# Altium PCB Pianoshield.PcbDoc
Units mil, origin at the board's own origin, x right, y up, seen from the top; angles counter-clockwise.
Board outline 2364.2 x 1578.97 mil, 2 copper layers (Top Layer, Bottom Layer); 66 components, 63 nets, 211 pads, 62 vias.
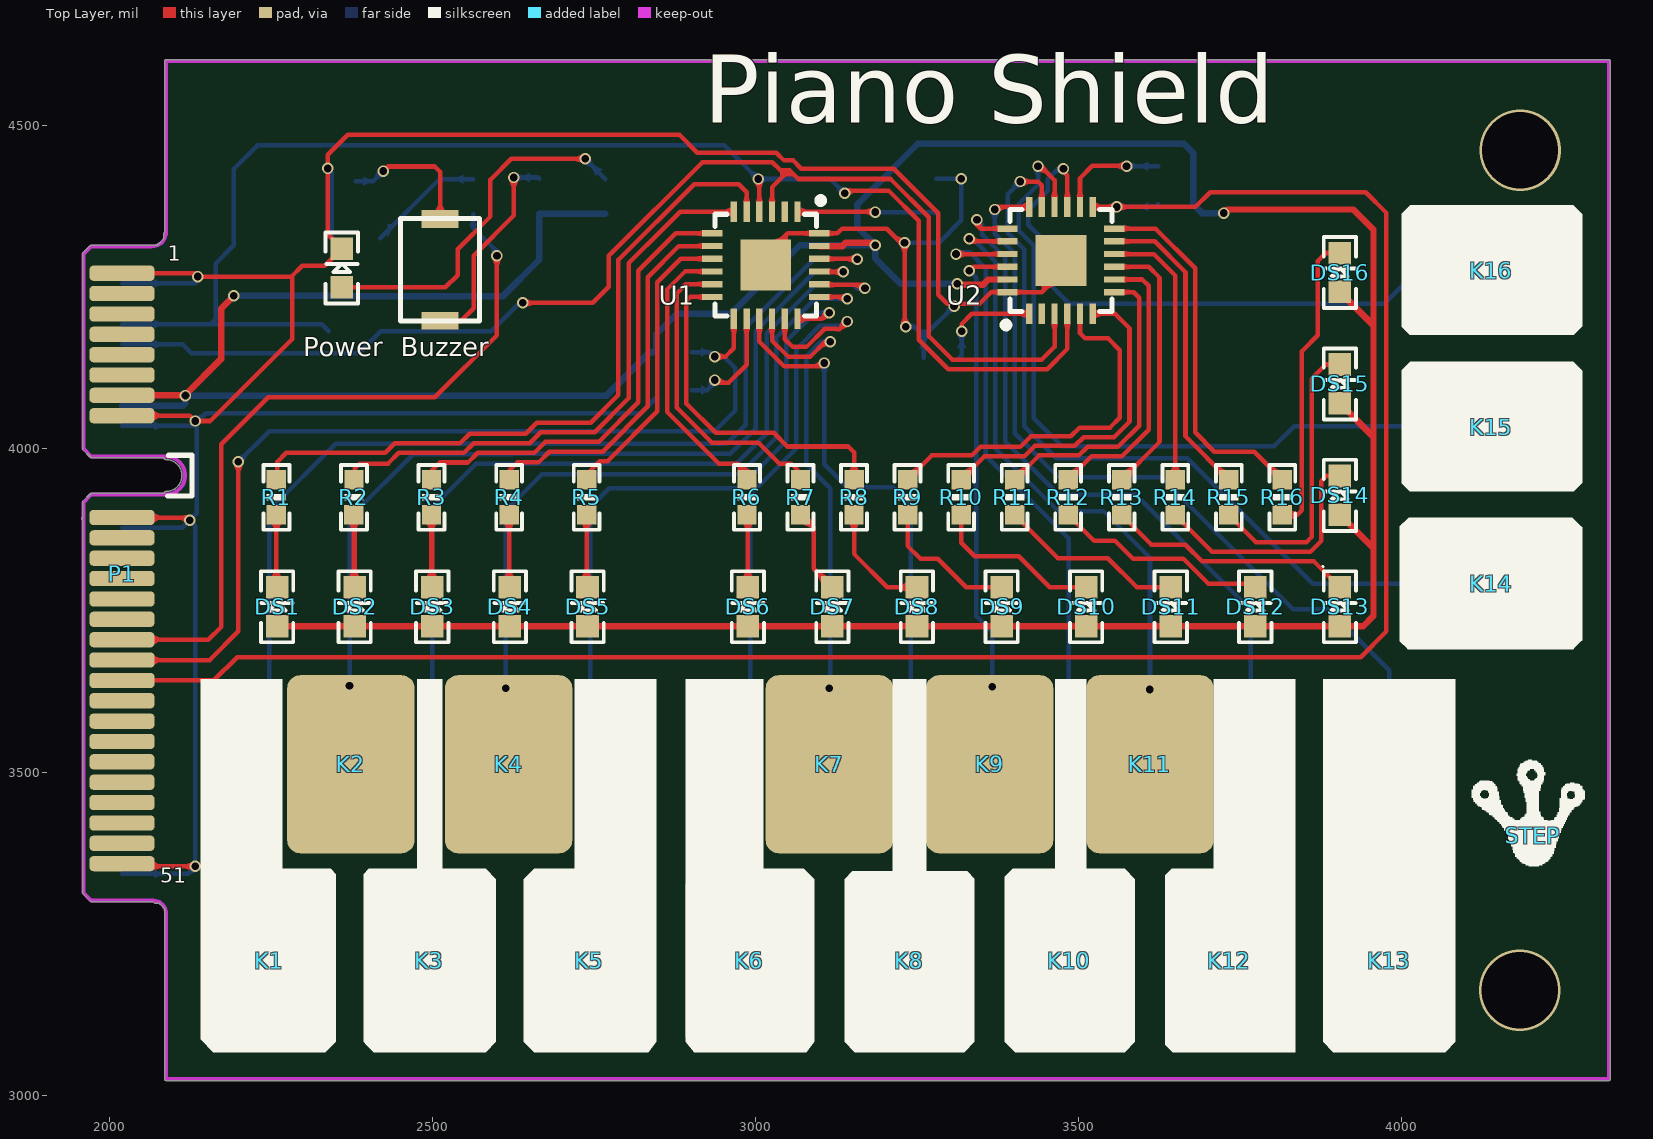
[diagram p0: Top Layer view]
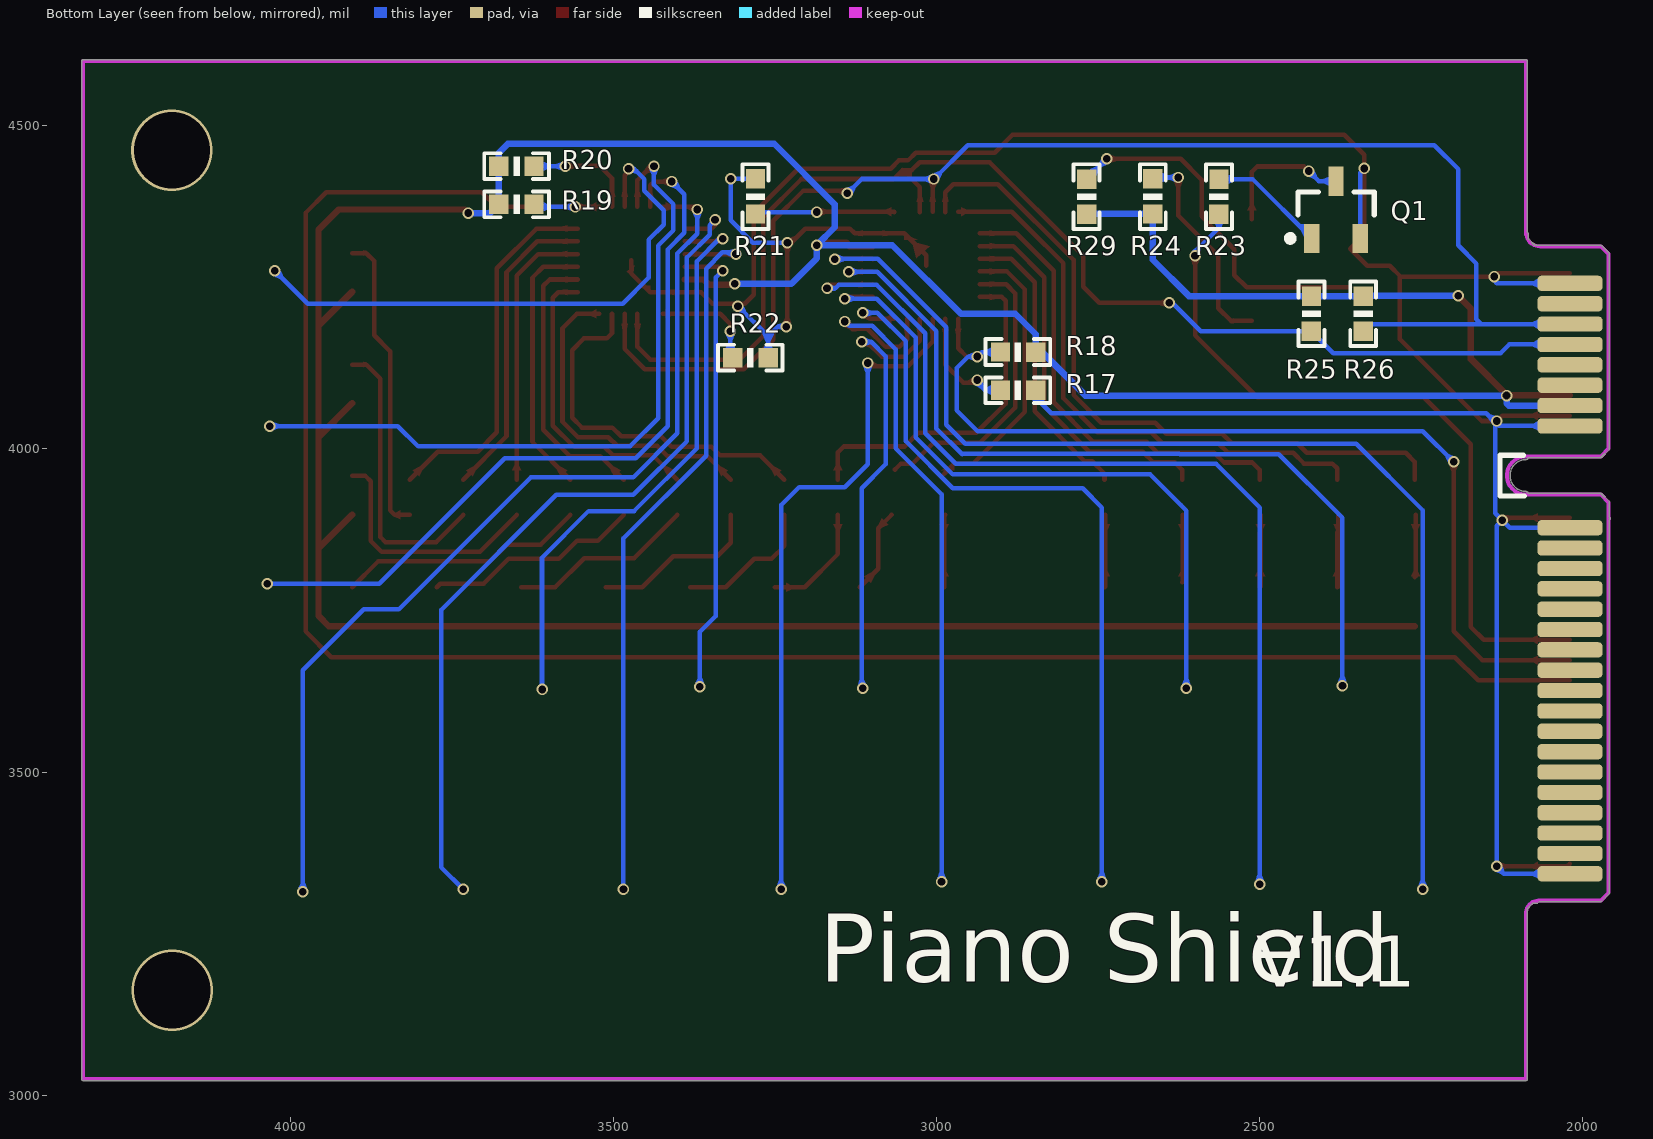
[diagram p1: Bottom Layer view, seen from below]

## Layer stack, top to bottom
Top Solder: solder mask 0.4, Solder Resist, Dk 3.5
Top Layer: signal copper 1.4
Dielectric 1: dielectric 12.6, FR-4, Dk 4.8
Bottom Layer: signal copper 1.4
Bottom Solder: solder mask 0.4, Solder Resist, Dk 3.5

## Board outline
1958.96,3313.52 1958.96,3890.74 cw(c1959.84,3892.52) 1958.44,3893.92 1958.96,3894.44 1958.96,3917.41 cw(c1960.94,3917.41) 1959.55,3918.82 1959.54,3918.81 1971.55,3930.82 1971.54,3930.81 cw(c1972.95,3929.42) 1972.95,3931.4 2084.29,3931.4 cw(c2088.9,3929.42) 2088.78,3934.43 ccw(c2088.18,3958.95) 2112.71,3958.95 ccw(c2088.18,3958.95) 2088.78,3983.46 cw(c2088.9,3988.47) 2084.29,3986.49 1972.99,3986.49 cw(c1972.99,3988.47) 1971.58,3987.08 1971.59,3987.07 1959.54,3999.12 1959.55,3999.11 cw(c1960.94,4000.52) 1958.96,4000.52 1958.96,4301.46 cw(c1960.94,4301.46) 1959.55,4302.88 1959.54,4302.87 1971.35,4314.68 1971.34,4314.67 cw(c1972.76,4313.28) 1972.76,4315.26 2074.66,4315.26 2084.24,4324.84 2084.24,4332.57 cw(c2086.22,4332.57) 2084.83,4333.99 2084.82,4333.98 2085.81,4334.97 2085.81,4598.82 cw(c2087.8,4598.82) 2086.21,4600.01 cw(c2088.19,4600) 2088.19,4601.98 4320.08,4601.98 ccw(c4320.08,4600) 4320.04,4601.98 ccw(c4320,4600) 4320,4601.98 4320.08,4601.98 cw(c4320.08,4600) 4322.06,4600 4322.06,3025.2 cw(c4320.08,3025.2) 4321.88,3024.36 cw(c4320,3025) 4320,3023.02 2088.19,3023.02 cw(c2088.19,3025) 2086.21,3025 2086.21,3288.94 2077.92,3297.23 2071.46,3297.23 cw(c2071.46,3299.21) 2070.05,3297.82 2070.06,3297.81 2068.6,3299.27 1973.21,3299.27 cw(c1973.21,3301.25) 1971.8,3299.86 1971.81,3299.85 1959.54,3312.12 1959.55,3312.11 cw(c1960.94,3313.52)

## Design rules (kind name [scope] priority, off if disabled: settings)
Clearance [All] p1: gap=6
PolygonConnect [All] p1: connectstyle=Relief reliefconductorwidth=10 reliefentries=4 polygonreliefangle="90 Angle" airgapwidth=10
RoutingVias [All] p1: holewidth=11.81 width=17.72 viastyle="Through Hole" minholewidth=11.81 minwidth=17.72 maxholewidth=11.81 maxwidth=17.72
SolderMaskExpansion [All] p1: expansion=4
Width [All] p1: maxlimit=10 minlimit=6 preferedwidth=7
30 further rules are at their usual default settings.

## Components (designator, comment, footprint, x,y, rotation, side; value= is the part's Value field where it differs from the comment)
Buzzer "BUZZER_SOT" BUZZER_1 2512,4277 r270 top (schematic designator BUZZER)
DS1 "LED1" LED0603 2259.94,3725.97 r90 top
DS2 "LED1" LED0603 2379.86,3725.97 r90 top
DS3 "LED1" LED0603 2499.94,3725.97 r90 top
DS4 "LED1" LED0603 2620.01,3725.97 r90 top
DS5 "LED1" LED0603 2740.09,3725.97 r90 top
DS6 "LED1" LED0603 2988.12,3725.97 r90 top
DS7 "LED1" LED0603 3118.96,3725.97 r90 top
DS8 "LED1" LED0603 3249.79,3725.97 r90 top
DS9 "LED1" LED0603 3380.62,3725.97 r90 top
DS10 "LED1" LED0603 3511.45,3725.97 r90 top
DS11 "LED1" LED0603 3642.28,3725.97 r90 top
DS12 "LED1" LED0603 3773.11,3725.97 r90 top
DS13 "LED1" LED0603 3903.94,3725.97 r90 top
DS14 "LED1" LED0603 3904,3898.31 r90 top
DS15 "LED1" LED0603 3904,4070.66 r90 top
DS16 "LED1" LED0603 3904,4243 r90 top
K1 "Keypad_1" 触摸按键5mm*7mm 2248.03,3208.66 r90 top
K2 "" 触摸按键5mm*7mm 2374.02,3512.36 r90 top
K3 "" 触摸按键5mm*7mm 2495.5,3208.66 r90 top
K4 "Keypad_1" 触摸按键5mm*7mm 2618.11,3512.36 r90 top
K5 "Keypad_1" 触摸按键5mm*7mm 2742.97,3208.66 r90 top
K6 "Keypad_1" 触摸按键5mm*7mm 2990.44,3208.66 r90 top
K7 "Keypad_1" 触摸按键5mm*7mm 3114.17,3512.36 r90 top
K8 "Keypad_1" 触摸按键5mm*7mm 3237.91,3208.66 r90 top
K9 "Keypad_1" 触摸按键5mm*7mm 3362.2,3512.36 r90 top
K10 "Keypad_1" 触摸按键5mm*7mm 3485.38,3208.66 r90 top
K11 "Keypad_1" 触摸按键5mm*7mm 3610.24,3512.36 r90 top
K12 "Keypad_1" 触摸按键5mm*7mm 3732.85,3208.66 r90 top
K13 "Keypad_1" 触摸按键5mm*7mm 3980.31,3208.66 r90 top
K14 "Keypad_1" 触摸按键5mm*7mm 4137.8,3791.34 r0 top
K15 "Keypad_1" 触摸按键5mm*7mm 4137.8,4033.46 r0 top
K16 "Keypad_1" 触摸按键5mm*7mm 4137.8,4275.59 r0 top
P1 "MINI_PCIE52" MINI_PCIE_52 2020,4051.46 r270 top
Power "LED1" LED0603 2360,4250 r90 top (schematic designator POWER)
Q1 "PNP" SOT-23B_N 2381.89,4370.08 r90 bottom
R1 "330R" 0603P 2258.77,3924.99 r90 top
R2 "330R" 0603P 2378.77,3924.99 r90 top
R3 "330R" 0603P 2498.77,3924.99 r90 top
R4 "330R" 0603P 2618.76,3924.99 r90 top
R5 "330R" 0603P 2738.77,3924.99 r90 top
R6 "330R" 0603P 2986.77,3924.99 r90 top
R7 "330R" 0603P 3069.58,3924.99 r90 top
R8 "330R" 0603P 3152.4,3924.99 r90 top
R9 "330R" 0603P 3235.22,3924.99 r90 top
R10 "330R" 0603P 3318.03,3924.99 r90 top
R11 "330R" 0603P 3400.85,3924.99 r90 top
R12 "330R" 0603P 3483.67,3924.99 r90 top
R13 "330R" 0603P 3566.48,3924.99 r90 top
R14 "330R" 0603P 3649.3,3924.99 r90 top
R15 "330R" 0603P 3732.11,3924.99 r90 top
R16 "330R" 0603P 3814.93,3924.99 r90 top
R17 "100K" 0603P 2874.02,4090.94 r180 bottom
R18 "10K" 0603P 2874.02,4150 r180 bottom
R19 "10K" 0603P 3649.61,4378.35 r0 bottom
R20 "0R" 0603P 3649.61,4437.4 r0 bottom
R21 "0R" 0603P 3280,4390.57 r90 bottom
R22 "0R" 0603P 3287.96,4141.36 r180 bottom
R23 "10k" 0603P 2562.99,4390.57 r270 bottom
R24 "R" 0603P 2665.48,4390.57 r90 bottom
R25 "10K" 0603P 2420,4209.05 r90 bottom
R26 "10K" 0603P 2340,4209.05 r90 bottom
R29 "330R" 0603P 2767.72,4390.57 r270 bottom
STEP "Comment" ECBC-STEP-M 4202,3402 r0 top
U1 "CAP1188" QFN24 3015.75,4284.44 r270 top
U2 "CAP1188" QFN24 3472.44,4291.73 r90 top

## Footprints (in the part's own frame and the unit in brackets; to place one, negate y for a bottom-side part, rotate by r counter-clockwise, add the part's x,y. Pads: shape width x height; smd on the part's side, far side on the other; paste and mask are expansions set on the pad)
0603P [mil]
  rect 30x30 smd: 1(-27,0) 2(27.5,-0.07)
  silkscreen extent -50,-20 50,20
BUZZER_1 [mm]
  rect 0.7x1.45 smd: 1(-2,0) 2(2,0)
  silkscreen extent -2.03,-1.55 2,1.55
ECBC-STEP-M [mil] "height=165mil"
  silkscreen extent -94,-47 81,117
LED0603 [mil]
  rect 35x35 smd: 1(0,0) 2(60,0)
  silkscreen extent -25,-25 85,25, body extent -3,-18 64,18, height 35
MINI_PCIE_52 [mm]
  rrect50% 0.6x2.55 smd: 1(-5.6,0) 3(-4.8,0) 5(-4,0) 7(-3.2,0) 9(-2.4,0) 11(-1.6,0) 13(-0.8,0) 15(0,0) 17(4,0) 19(4.8,0) 21(5.6,0) 23(6.4,0) 25(7.2,0) 27(8,0) 29(8.8,0) 31(9.6,0) 33(10.4,0) 35(11.2,0) 37(12,0) 39(12.8,0) 41(13.6,0) 43(14.4,0) 45(15.2,0) 47(16,0) 49(16.8,0) 51(17.6,0)
  rrect50% 0.6x2.55 smd far side: 2(-5.2,0) 4(-4.4,0) 6(-3.6,0) 8(-2.8,0) 10(-2,0) 12(-1.2,0) 14(-0.4,0) 16(0.4,0) 18(4.4,0) 20(5.2,0) 22(6,0) 24(6.8,0) 26(7.6,0) 28(8.4,0) 30(9.2,0) 32(10,0) 34(10.8,0) 36(11.6,0) 38(12.4,0) 40(13.2,0) 42(14,0) 44(14.8,0) 46(15.6,0) 48(16.4,0) 50(17.2,0) 52(18,0)
  silkscreen extent 1.55,1.8 3.15,2.75
QFN24 [mm]
  rect 2x2 smd: 0(0,0)
  rect 0.8x0.25 smd: 1(-2.101,1.25) 2(-2.101,0.75) 3(-2.101,0.25) 4(-2.101,-0.25) 5(-2.101,-0.75) 6(-2.101,-1.25) 13(2.101,-1.25) 14(2.101,-0.75) 15(2.101,-0.25) 16(2.101,0.25) 17(2.101,0.75) 18(2.101,1.25)
  rect 0.25x0.8 smd: 7(-1.25,-2.101) 8(-0.75,-2.101) 9(-0.25,-2.101) 10(0.25,-2.101) 11(0.75,-2.101) 12(1.25,-2.101) 19(1.25,2.101) 20(0.75,2.101) 21(0.25,2.101) 22(-0.25,2.101) 23(-0.75,2.101) 24(-1.25,2.101)
  silkscreen extent -2.66,-2 2,2.28
SOT-23B_N [mm] "SOT23, 3-Leads, Body 2.9x1.3mm, Pitch 0.95mm, Lead Span 2.4mm, IPC Medium Density"
  rect 1.15x0.6 smd: 1(-1.125,0.95) 2(-1.125,-0.95) 3(1.125,0)
  silkscreen extent -1.25,-1.5 0.7,1.93, body extent -0.7,-1.5 0.7,1.5, height 1.14
触摸按键5mm*7mm [mm]
  rrect20% 7x5 smd mask+0.102: 0(0,0)

## Part data
DS1 DS2 DS3 DS4 DS5 DS6 DS7 DS8 DS9 DS10 DS11 DS12 DS13 DS14 DS15 DS16 Power: library part LED2, "Typical RED, GREEN, YELLOW, AMBER GaAs LED"
K2 K3: library part Keypad_1
Q1: "PNP Bipolar Transistor"
R1 R2 R3 R4 R5 R6 R7 R8 R9 R10 R11 R12 R13 R14 R15 R16 R17 R18 R19 R20 R21 R22 R23 R25 R26 R29: library part R

## Via types
v1: diameter 17.72, hole 11.81, Top Layer to Bottom Layer, tented both sides, 60 vias
v2: diameter 125.98, hole 118.11, Top Layer to Bottom Layer, 2 vias

## Nets (pads, with @x,y where several pads share a name; then routed paths per layer and width w, separated by ;. In a path a pad name is that pad's centre, name@x,y a point inside that pad or via, vN(x,y) a via of type N, cw(c..) or ccw(c..) an arc to the next point about the centre after c; other vN are vias at no path point)
3.3V: DS1.1 DS2.1 DS3.1 DS4.1 DS5.1 DS6.1 DS7.1 DS8.1 DS9.1 DS10.1 DS11.1 DS12.1 DS13.1 DS14.1 DS15.1 DS16.1 P1.13 P1.14 R18.2 R19.2 R20.2 R24.1 R25.2 R26.2 R29.2 U1.23 U2.23 | length 6115.5
  Top Layer w10: P1.13 v1@2117.05,4082.96 ; v1@2117.44,4083.35 2173.23,4139.14 2173.23,4217.15 v1(2192.91,4236.84) ; DS1.1@2260,3726 DS8.1 DS13.1 3940,3726 3956,3742 3956,3846.31 ; U1.23@3098.47,4313.38 3133.86,4313.38 3139.76,4319.29 3181.1,4319.29 v1(3185.04,4315.35) ; v1(3311.88,4255.42) 3313.06,4254.25 3352.05,4254.25 3360,4262.2 U2.23 ; v1(3724.41,4365) 3729.88,4370.47 3924.53,4370.47 3956,4339 3956,4191 ; DS14.1 3956,3846.31 ; DS15.1 3956,4018.66 ; DS16.1 3956,4191 ; 3956,3846.31 3956,4018.66 ; 3956,4018.66 3956,4191
  Bottom Layer w10: P1.14 2114.46,4067.21 2118.11,4070.87 v1(2118.11,4082.68) 2769.62,4082.68 2836.87,4149.93 R18.2 2846.52,4177.62 2877.95,4209.05 2962.05,4209.05 3068.35,4315.35 3148.4,4315.35 3148.48,4315.43 v1(3185.04,4315.35) ; v1(2192.91,4236.84) 2339.65,4236.84 R26.2 R25.2 2609.47,4236.55 2665.48,4292.56 R24.1 R29.2@2767.28,4363.57 ; v1(3311.88,4255.42) 3224.38,4255.42 3185.04,4294.76 v1(3185.04,4315.35) v1(3185.04,4315.35) ; v1(3724.41,4365) 3690.51,4365 R19.2 R20.2 3677.11,4457.89 3663,4472 3251.13,4472 3157.48,4378.35 3157.48,4342.91 v1(3185.04,4315.35)
ALERT_IRQ1: P1.31 R18.1 U1.13 | length 1485.4
  Top Layer w7: P1.31 2155.53,3673.53 2200,3718 v1(2200,3980) ; v1(2937.01,4143) 2953.63,4143 2966.54,4155.9 U1.13@2966.54,4201.13
  Bottom Layer w7: v1(2200,3980) 2247.56,4027.56 2936.45,4027.56 2968.5,4059.61 2968.5,4125.31 2950.82,4143 v1(2937.01,4143) 2930.01,4150 R18.1
ALERT_IRQ2: P1.33 R19.1 U2.13 | length 3176.9
  Top Layer w7: P1.33 2162.03,3642.03 2198,3678 3936,3678 3976,3718 3976,4365.14 3943.83,4397.31 3703.21,4397.31 3680.36,4374.46 v1(3559.01,4374.46) U2.13
  Bottom Layer w7: v1(3559.01,4374.46) 3618.72,4374.46 R19.1
BUZZER: P1.29 R23.2 | length 1143
  Top Layer w7: P1.29 2153.56,3705.02 2173.24,3724.71 2173.24,4007.24 2246,4080 2504,4080 2600,4176 v1(2600,4298.72)
  Bottom Layer w7: R23.2 2563.06,4342.46 2600,4305.51 v1(2600,4298.72)
GND: P1.1 P1.2 P1.15 P1.16 P1.17 P1.18 P1.51 P1.52 Power.2 Q1.2 R17.2 R21.2 R22.2 U1.0 U1.24 U2.0 U2.24 | length 5257.2
  Top Layer w7: P1.51 2024.24,3354.33 v1(2133.05,3354.33) ; P1.17 2120.57,3894 v1(2124.8,3889.76) ; P1.15 2124.9,4051.46 v1(2133.05,4043.31) 2156.37,4043.31 2283,4169.94 2283,4266 2282.21,4266.79 ; P1.1 v1@2130.21,4271.94 ; v1@2137.39,4264.75 v1@2130.21,4271.94 ; U1.0@3015.75,4283.86 U1.0 3015.75,4299.6 3049.8,4333.65 U1.24 3126.57,4333.65 3133.86,4340.94 3203.15,4340.94 3224.8,4319.29 v1(3230.51,4319.29) 3230.51,4191.2 v1(3232.35,4189.37) ; U2.0 3472.44,4272.05 3442.91,4242.52 U2.24 3364.24,4242.52 3346.53,4224.8 3311.02,4224.8 v1(3307.09,4220.87) 3307.09,4224.8 3296.72,4224.8 3282.87,4238.65 3282.87,4364.72 3214.03,4433.56 3071,4433.56 3058.16,4446.4 3044.16,4446.4 3032.16,4458.4 2910,4458.4 2882.4,4486 2369,4486 2338,4455 v1(2338,4434) 2338,4332 Power.2 2333.46,4283.46 2298.89,4283.46 2282.21,4266.79 ; v1@2130.21,4271.94 2132.24,4271.94 v1(2137.39,4266.79) 2282.21,4266.79
  Bottom Layer w7: P1.52 2122.33,3342.8 2133.05,3353.53 v1(2133.05,3354.33) 2133.05,3881.51 v1(2124.8,3889.76) ; P1.18 2113.28,3878.24 v1(2124.8,3889.76) ; P1.16 v1@2130.2,4035.72 ; P1.2 2133.05,4256.2 2137.39,4260.54 v1(2137.39,4266.79) ; v1(2338,4434) 2344.49,4427.51 Q1.2 ; R17.2@2846.52,4079.08 2822.55,4055.12 2149.61,4055.12 2135.42,4040.94 2135.42,3900.38 v1(2124.8,3889.76) ; v1(3230.51,4319.29) 3284.09,4319.29 3318.4,4353.59 v1(3318.4,4418.07) R21.2 ; v1(3232.35,4189.37) 3245.33,4189.37 3260.46,4174.24 ; R22.2 3260.46,4174.24 ; v1(3307.09,4220.87) 3260.46,4174.24
NetBUZZER_1: Buzzer.1 Q1.3 | length 216.1
  Top Layer w7: v1(2424,4430) 2431.01,4437.01 2504,4437.01 2512,4429.01 Buzzer.1
  Bottom Layer w7: Q1.3 2408.37,4414.37 v1(2424,4430)
NetBUZZER_2: Buzzer.2 R24.2 | length 328.2
  Top Layer w7: Buzzer.2 2544.44,4198.26 2563.89,4217.71 2563.89,4299.09 2626,4361.2 v1(2626,4420)
  Bottom Layer w7: v1(2626,4420) 2663.48,4420 R24.2
NetDS1_2: DS1.2 R1.1 | length 96.5
  Top Layer w7: R1.1 2258.77,3803.17 DS1.2@2259.94,3802
NetDS2_2: DS2.2 R2.1 | length 197.6
  Top Layer w7: R2.1 2378.77,3787.06 DS2.2 2380,3786.11 2380,3871
NetDS3_2: DS3.2 R3.1 | length 197.6
  Top Layer w7: R3.1 2498.77,3787.14 DS3.2 2500,3786.03 2500,3871
NetDS4_2: DS4.2 R4.1 | length 104.5
  Top Layer w7: R4.1 2618.77,3795.23 DS4.2@2620,3794
NetDS5_2: DS5.2 R5.1 | length 112.4
  Top Layer w7: R5.1 2738.77,3787.3 DS5.2@2740,3786.06
NetDS6_2: DS6.2 R6.1 | length 112.6
  Top Layer w7: R6.1 2988,3896.76 2988,3786.09 DS6.2
NetDS7_2: DS7.2 R7.1 | length 132.5
  Top Layer w7: R7.1 3090,3877.58 3090,3814.92 DS7.2
NetDS8_2: DS8.2 R8.1 | length 179.2
  Top Layer w7: R8.1 3152.4,3837.6 3204.03,3785.97 DS8.2
NetDS9_2: DS9.2 R9.1 | length 219.9
  Top Layer w7: R9.1 3235.22,3850 3255.22,3830 3282,3830 3326.03,3785.97 DS9.2
NetDS10_2: DS10.2 R10.1 | length 265
  Top Layer w7: R10.1 3318.03,3855 3339.03,3834 3407.23,3834 3455.26,3785.97 DS10.2
NetDS11_2: DS11.2 R11.1 | length 287.8
  Top Layer w7: R11.1 3467.84,3831 3545,3831 3590.03,3785.97 DS11.2
NetDS12_2: DS12.2 R12.1 | length 335.8
  Top Layer w7: R12.1 3523.66,3858 3556,3858 3584,3830 3662,3830 3700.66,3791.34 3767.74,3791.34 DS12.2
NetDS13_2: DS13.2 R13.1 | length 383.9
  Top Layer w7: R13.1 3612.48,3852 3665,3852 3691,3826 3863.9,3826 DS13.2
NetDS14_2: DS14.2 R14.1 | length 380.9
  Top Layer w7: R14.1 3706.17,3841.13 3858.49,3841.13 3875.06,3857.7 3875.06,3950 3883.37,3958.31 DS14.2
NetDS15_2: DS15.2 R15.1 | length 446.4
  Top Layer w7: R15.1 3774.11,3856 3852.33,3856 3860.19,3863.86 3860.19,4108.65 3882.19,4130.66 DS15.2
NetDS16_2: DS16.2 R16.1 | length 468.2
  Top Layer w7: R16.1 3837.99,3897.99 3845.31,3905.31 3845.31,4151.31 3870,4176 3870,4290.81 3882.19,4303 DS16.2
NetK1_0: K1.0 U1.22 | length 1805.1
  Top Layer w7: U1.22@3098.47,4293.7 3098.76,4293.99 3099.02,4294.25 3156.93,4294.25 v1(3157.48,4293.7)
  Bottom Layer w7: v1(2248.03,3318.9) 2248.03,3905.51 2350.39,4007.87 2955.34,4007.87 2985.13,4037.66 2985.13,4188.53 3090.84,4294.25 3156.93,4294.25 v1(3157.48,4293.7)
NetK2_0: K2.0 U1.21 | length 1306.4
  Top Layer w7: U1.21@3098.47,4274.01 v1(3135.83,4274.01)
  Bottom Layer w7: v1(2372,3634) 2372,3893.41 2377.95,3899.36 2470.73,3992.13 2623.79,3992.13 ; 2624.08,3992.41 2960.33,3992.41 ; 2960.33,3991.83 3000,4031.5 3000,4182.37 3091.64,4274.01 v1(3135.83,4274.01)
NetK3_0: K3.0 U1.20 | length 1560.9
  Top Layer w7: U1.20 3099.6,4253.78 3163.93,4253.78 v1(3169.29,4248.42)
  Bottom Layer w7: v1(2500,3326.77) 2500,3909.45 2567.5,3976.95 2970.32,3976.95 3017.5,4024.13 3017.5,4178.83 3092.45,4253.78 3151.03,4253.78 3156.39,4248.42 v1(3169.29,4248.42)
NetK4_0: K4.0 U1.19 | length 1073.8
  Top Layer w7: U1.19 3139.17,4235.23 v1(3141.73,4232.67)
  Bottom Layer w7: v1(2613.49,3630) 2613.49,3904.82 2622.05,3913.38 2669.29,3960.63 2975.03,3960.63 3032.37,4017.97 3032.37,4172.67 3092.37,4232.67 v1(3141.73,4232.67)
NetK5_0: K5.0 U1.18 | length 1220.6
  Top Layer w7: U1.18@3064.96,4201.13 3102.31,4201.13 3113.03,4211.84 3114.17,4212.99 v1(3114.17,4210.7)
  Bottom Layer w7: v1(2744.09,3330.71) 2744.09,3909.45 2773.95,3939.3 2974.73,3939.3 3047.24,4011.81 3047.24,4166.51 3091.43,4210.7 v1(3114.17,4210.7)
NetK6_0: K6.0 U1.17 | length 1098.7
  Top Layer w7: U1.17@3045.28,4201.13 3045.28,4169.97 3057.37,4157.87 3078.79,4157.87 3106.89,4185.98 3124.2,4185.98 3124.74,4185.43 3129.92,4185.43 v1(3141.73,4197.24)
  Bottom Layer w7: v1(2992.13,3330.71) 2992.13,3930.01 3062.99,4000.87 3062.99,4153.94 3099.52,4190.46 3134.95,4190.46 v1(3141.73,4197.24)
NetK7_0: K7.0 U1.16 | length 719.1
  Top Layer w7: U1.16@3025.59,4201.13 3025.59,4167.72 3050.31,4143 3084.95,4143 3107.7,4165.75 v1(3115.81,4165.75)
  Bottom Layer w7: v1(3114,3630) 3115.81,3631.81 3115.81,3939.3 3078.74,3976.38 3078.74,4143.39 3101.09,4165.75 v1(3115.81,4165.75)
NetK8_0: K8.0 U1.15 | length 1064.2
  Top Layer w7: U1.15@3005.91,4201.13 3005.91,4166.37 3044.15,4128.12 3101.36,4128.12 v1(3106.3,4133.06)
  Bottom Layer w7: v1(3106.3,4133.06) 3106.3,3976.38 3141.73,3940.94 3212.6,3940.94 3240.16,3913.39 v1(3240.16,3318.9)
NetK9_0: K9.0 U2.22 | length 720.1
  Top Layer w7: v1(3330.71,4275.98) 3336.61,4281.89 U2.22
  Bottom Layer w7: v1(3330.71,4275.98) 3341.33,4265.36 3341.33,3741.63 3366,3716.96 v1(3366,3632)
NetK10_0: K10.0 U2.21 | length 1151.5
  Top Layer w7: v1(3310.15,4301.57) U2.21
  Bottom Layer w7: v1(3310.15,4301.57) 3310.15,4303.76 3310.48,4304.09 3331.21,4304.09 3356.21,4279.1 3356.21,3989.79 3484.25,3861.75 v1(3484.25,3318.9)
NetK11_0: K11.0 U2.20 | length 918
  Top Layer w7: v1(3330.71,4325.2) 3334.65,4321.26 U2.20
  Bottom Layer w7: v1(3330.71,4325.2) 3336,4325.2 3371.08,4290.11 3371.08,4000.75 3467.83,3904 3538.24,3904 3610.24,3832 v1@3610.24,3628
  other v1: 3610,3628
NetK12_0: K12.0 U2.19 | length 1352.4
  Top Layer w7: v1(3342.52,4354.72) 3342.52,4346.85 3348.43,4340.94 U2.19
  Bottom Layer w7: v1(3342.52,4354.72) 3350.94,4346.3 3350.94,4331.29 3385.96,4296.27 3385.96,4012.04 3469,3929 3588,3929 3766,3751 3766,3352.61 v1(3732.28,3318.9)
NetK13_0: K13.0 U2.18 | length 1487.8
  Top Layer w7: v1(3370.03,4370.47) 3374.02,4374.46 U2.18
  Bottom Layer w7: v1(3370.03,4370.47) 3370.03,4333.23 3400.83,4302.43 3400.83,4024.17 3469,3956 3627.5,3956 3831.53,3751.97 3885.83,3751.97 3980.32,3657.48 v1(3980.32,3314.96)
NetK14_0: K14.0 U2.17 | length 1187.5
  Top Layer w7: v1(3409.45,4413.78) 3437.01,4413.78 3442.91,4407.87 U2.17
  Bottom Layer w7: v1(3409.45,4413.78) 3390,4394.33 3390,4379.12 3390.26,4378.85 3390.26,4362.09 3390,4361.83 3390,4334.3 3415.7,4308.59 3415.7,4035.3 3465.43,3985.57 3667.88,3985.57 3862.11,3791.34 v1(4035.43,3791.34)
NetK15_0: K15.0 U2.16 | length 1122.3
  Top Layer w7: v1(3437.01,4437.4) 3437.01,4433.46 3444.88,4433.46 3462.6,4415.75 U2.16
  Bottom Layer w7: v1(3437.01,4437.4) 3437.01,4408.53 3406.87,4378.4 3406.87,4338.46 3430.58,4314.75 3430.58,4047.49 3474.07,4004 3802,4004 3833.43,4035.43 v1(4031.5,4035.43)
NetK16_0: K16.0 U2.15 | length 888.9
  Top Layer w7: v1(3476.38,4433.46) 3472.44,4433.46 3482.28,4423.62 U2.15
  Bottom Layer w7: v1(3476.38,4433.46) 3467.88,4433.46 3452,4417.59 3452,4399.53 3422,4369.53 3422,4347.13 3445.45,4323.68 3445.45,4264.65 3485.4,4224.69 3972.73,4224.69 v1(4023.62,4275.59)
NetPOWER_1: Power.1 R29.1 | length 559.7
  Top Layer w7: Power.1 2520.22,4250 2539.22,4269 2539.22,4308.98 2590,4359.76 2590,4416.52 2622.3,4448.82 v1(2736.46,4448.82)
  Bottom Layer w7: v1(2736.46,4448.82) R29.1
NetQ1_1: Q1.1 R23.1 | length 181.7
  Bottom Layer w7: Q1.1 2511.07,4417.57 R23.1
NetR1_2: R1.2 U1.5 | length 1089.7
  Top Layer w7: R1.2@2260.07,3952.49 2260.07,3980 2274.12,3994.05 2427.02,3994.05 2441.84,4008.87 2542.8,4008.87 2557.73,4023.8 2644.76,4023.8 2661.59,4040.62 2744.93,4040.62 2788,4083.69 2788,4292.56 2904.97,4409.53 2974,4409.53 2986.22,4397.31 U1.5 U1.5@2986.22,4366.58
NetR2_2: R2.2 U1.6 | length 890.8
  Top Layer w7: R2.2@2380.06,3952.49 2380.06,3970 2387.56,3977.5 2431.5,3977.5 2448,3994 2548.97,3994 2563.89,4008.93 2650.93,4008.93 2667.75,4025.75 2751.1,4025.75 2803.58,4078.24 2803.58,4287.11 2858.13,4341.65 2858.2,4341.65 2883.71,4367.17 U1.6
NetR3_2: R3.2 U1.7 | length 718.9
  Top Layer w7: R3.2@2500.06,3952.49 2500.06,3967.56 2511.63,3979.13 2555.13,3979.13 2570.05,3994.05 2658.06,3994.05 2674.88,4010.87 2757.26,4010.87 2818.46,4072.07 2818.46,4275.54 2876.57,4333.65 U1.7
NetR4_2: R4.2 U1.8 | length 588.7
  Top Layer w7: R4.2@2620.06,3952.49 2620.06,3967.56 2631.68,3979.18 2664.22,3979.18 2681.04,3996 2763.42,3996 2833.33,4065.91 2833.33,4265.92 2881.38,4313.97 U1.8
NetR5_2: R5.2 U1.9 | length 457.2
  Top Layer w7: R5.2@2740.06,3952.49 2740.06,3962.06 2759.13,3981.13 2771.13,3981.13 2848.2,4058.2 2848.2,4258.05 2884.44,4294.28 U1.9
NetR6_2: R6.2 U1.10 | length 435.1
  Top Layer w7: U1.10 2890.97,4274.6 2863.08,4246.71 2863.08,4057.78 2943.36,3977.5 2972.5,3977.5 R6.2@2988.06,3961.94
NetR7_2: R7.2 U1.11 | length 463.3
  Top Layer w7: U1.11 2892.32,4254.91 2877.95,4240.55 2877.95,4064.16 2932.11,4010 3004,4010 3036.5,3977.5 3054.96,3977.5 3064.17,3968.29
NetR8_2: R8.2 U1.12 | length 534.8
  Top Layer w7: U1.12 2898.81,4235.23 2892.83,4229.25 2892.83,4070.32 2938.27,4024.87 3028.16,4024.87 3049.16,4003.87 3143.28,4003.87 3152.46,3994.69 R8.2
NetR9_2: R9.2 U2.5 | length 575.1
  Top Layer w7: R9.2 3272.79,3990 3334.57,3990 3348.04,4003.48 3409.83,4003.48 3426.1,4019.75 3487.88,4019.75 3501.36,4033.23 3548.39,4033.23 3563.65,4048.48 3563.65,4153 3545.65,4171 3509.97,4171 3501.97,4179 U2.5
NetR10_2: R10.2 U2.6 | length 508.1
  Top Layer w7: R10.2 3354.21,3988.6 3415.99,3988.6 3432.26,4004.87 3494.04,4004.87 3507.52,4018.35 3554.55,4018.35 3578.52,4042.32 3578.52,4186.61 3556.13,4209.01 U2.6
NetR11_2: R11.2 U2.7 | length 466.8
  Top Layer w7: R11.2 3438.42,3990 3500.2,3990 3513.68,4003.48 3560.71,4003.48 3593.39,4036.16 3593.39,4234.13 3585.01,4242.52 U2.7
NetR12_2: R12.2 U2.8 | length 436.2
  Top Layer w7: R12.2 3519.84,3988.6 3566.87,3988.6 3608.27,4030 3608.27,4252.36 3598.43,4262.2 U2.8
NetR13_2: R13.2 U2.9 | length 413.6
  Top Layer w7: U2.9 3608.27,4281.89 3624.93,4265.23 3624.93,4010.87 R13.2
NetR14_2: R14.2 U2.10 | length 423.8
  Top Layer w7: U2.10 3616.14,4301.57 3649.36,4268.35 R14.2
NetR15_2: R15.2 U2.11 | length 478.6
  Top Layer w7: U2.11 3617.49,4321.26 3665.16,4273.59 3665.16,4019.52 R15.2
NetR16_2: R16.2 U2.12 | length 569.8
  Top Layer w7: U2.12 3618.84,4340.94 3680.36,4279.42 3680.36,4150.36 3680.03,4150.03 3680.03,4025.68 3709.71,3996 3771.49,3996 R16.2
NetR17_1: R17.1 U1.14 | length 177.8
  Top Layer w7: v1(2937,4106.68) 2940.93,4102.75 2958.44,4102.75 2986.22,4130.53 U1.14@2986.22,4201.13
  Bottom Layer w7: R17.1 2901.3,4091.23 2925.48,4091.23 2937,4102.75 v1(2937,4106.68)
NetR20_1: R20.1 U2.14 | length 173.3
  Top Layer w7: U2.14 3501.97,4419.09 3520.82,4437.95 3573.42,4437.95 v1(3573.96,4437.4)
  Bottom Layer w7: v1(3573.96,4437.4) R20.1
NetR21_1: R21.1 U1.1 | length 217.1
  Top Layer w7: U1.1@3064.96,4366.58 U1.1 3180.23,4367.17 3180.86,4366.53 v1(3185.04,4366.53)
  Bottom Layer w7: v1(3185.04,4366.53) 3277.03,4366.53 R21.1
NetR22_1: R22.1 U2.1 | length 164.4
  Top Layer w7: v1(3318.9,4182.11) 3318.9,4193.31 3334.6,4209.01 U2.1
  Bottom Layer w7: R22.1 3318.9,4145.29 v1(3318.9,4182.11)
SCL: P1.6 R26.1 U1.4 U2.4 | length 2259.7
  Top Layer w7: v1(3003.94,4417.65) 3005.91,4415.68 U1.4 ; v1(3137.75,4395.48) 3137.75,4399.78 3205.75,4399.78 3252.58,4352.95 3252.58,4169.14 3298.19,4123.53 3451.02,4123.53 3482.28,4154.79 U2.4
  Bottom Layer w7: P1.6 2157.2,4193.2 ; R26.1 2328.86,4193.2 2157.2,4193.2 ; v1(3137.75,4395.48) 3115.57,4417.65 v1(3003.94,4417.65) 2951.59,4470 2229.84,4470 2192.91,4433.07 2192.91,4314.96 2164.8,4286.84 2164.8,4200.79 2157.2,4193.2
SDA: P1.8 R25.1 U1.3 U2.3 | length 1967.4
  Top Layer w7: v1(2640,4226) 2748,4226 2773.13,4251.13 2773.13,4298.72 2917.93,4443.53 3026,4443.53 3038,4431.53 3052,4431.53 ; U1.3@3025.59,4366.58 U1.3 3025.59,4405.12 3052,4431.53 ; U2.3 3462.6,4158.12 3442.87,4138.4 3304.35,4138.4 3268,4174.75 3268,4358.56 3208.91,4417.65 3065.88,4417.65 3052,4431.53
  Bottom Layer w7: P1.8 2113.89,4161.7 2127.37,4148.22 2386.17,4148.22 R25.1 2591.36,4182.05 2635.31,4226 v1(2640,4226)
pads on no net: P1.3 P1.4 P1.5 P1.7 P1.9 P1.10 P1.11 P1.12 P1.19 P1.20 P1.21 P1.22 P1.23 P1.24 P1.25 P1.26 P1.27 P1.28 P1.30 P1.32 P1.34 P1.35 P1.36 P1.37 P1.38 P1.39 P1.40 P1.41 P1.42 P1.43 P1.44 P1.45 P1.46 P1.47 P1.48 P1.49 P1.50 U1.2 U2.2
copper on no net:
  other v2: 4182.28,3162.6 4182.68,4462.2

## Keep-outs
Keep-Out Layer:
  lines w6: 1972.95,3929.42 2088.11,3929.42 ; 1973,3301.46 2068,3301.46 ; 1972.99,3988.47 2088.9,3988.47 ; 2065.96,4313.49 ccw(c2066.57,4334.9) 2087.99,4335.13 2088.05,4600 ; 2066.08,4313.28 1971.97,4313.28 1960.16,4301.46 1960.16,4000.52 1972.2,3988.47 2088.11,3988.47 cw(c2088.11,3958.94) 2088.11,3929.42 ; 2068.42,3301.46 1972.21,3301.46 1960.16,3313.52 1960.16,3917.41 1972.16,3929.42 2088.11,3929.42 ; 2068.58,3301.46 cw(c2068,3281.22) 2088.24,3280.64 ; 2088.19,3281.22 2088.19,3025.2 4320.08,3025.2 4320.08,4600 2088.98,4600

## Silkscreen, mask and mechanical layers (free items; w line width, h text height)
Top Overlay:
  region: 2141.73,3644 2196,3644 2267.72,3644 2267.72,3350.39 2342.52,3350.39 2350.39,3342.52 2350.39,3082.68 2334.65,3066.93 2161.42,3066.93 2141.73,3086.61
  region: 2515.75,3644 2515.75,3350.39 2582.68,3350.39 2598.43,3334.65 2598.43,3082.68 2582.68,3066.93 2409.45,3066.93 2397.64,3078.74 2393.7,3082.68 2393.7,3334.65 2393.7,3342.52 2401.57,3350.39 2405.51,3350.39 2409.45,3350.39 2476.38,3350.39 2476.38,3644 2498,3644
  region: 2905.51,3644 2924,3644 2948,3644 2954,3644 2962,3644 3011.81,3644 3011.81,3350.39 3074.58,3350.39 3090.55,3334.42 3090.55,3082.68 3078.74,3066.93 2992.13,3066.93 2905.51,3066.93 2891.73,3082.68 2891.73,3644
  region: 3212.6,3644 3240,3644 3263.78,3644 3263.78,3346.46 3327.2,3346.46 3338.58,3335.08 3338.58,3082.68 3322.83,3066.93 3153.54,3066.93 3137.8,3082.68 3137.8,3334.65 3149.61,3346.46 3212.6,3346.46
  region: 3463.29,3644 3488,3644 3511.81,3644 3511.81,3350.39 3570.87,3350.39 3586.61,3334.65 3586.61,3082.68 3570.87,3066.93 3401.57,3066.93 3385.83,3082.68 3385.83,3338.58 3397.64,3350.39 3462.02,3350.39 3463.29,3351.67
  region: 3708.66,3644 3772,3644 3834.65,3644 3834.65,3066.93 3645.67,3066.93 3633.86,3078.74 3633.86,3340.55 3643.7,3350.39 3708.66,3350.39
  region: 3877.95,3644 3904,3644 3938,3644 4082.68,3644 4082.68,3351.67 4082.68,3342.52 4082.68,3082.68 4066.93,3066.93 3893.7,3066.93 3877.95,3082.68
  region: 2720.47,3644 2782,3644 2846.34,3644 2846.34,3447.78 2846.34,3082.68 2834.18,3066.93 2657.48,3066.93 2641.73,3082.68 2641.73,3334.65 2657.48,3350.39 2720.47,3350.39
  region: 4264,3692 4277,3705 4277,3878 4263,3892 4011,3892 3998,3879 3998,3704 4010,3692
  region: 4266,3935 4279,3948 4279,4121 4265,4135 4013,4135 4000,4122 4000,3947 4012,3935
  region: 4266,4177 4279,4190 4279,4363 4265,4377 4013,4377 4000,4364 4000,4189 4012,4177
  lines w3.94: 3877.52,3818.5 3877.95,3818.07 ; 3998,3704 3998,3712 3998,3855 3998,3879 4011,3892 4254,3892 4263,3892 4277,3878 4277,3874 4277,3705 4264,3692 4015,3692 4010,3692 3998,3704
  text "Piano Shield" at 2920,4470 h180
Bottom Overlay:
  text "V1.1" at 2505,3142 h135
  text "Piano Shield" at 3181,3141 h180
Top Solder:
  region: 4149.61,4076.77 4208.66,4017.72 4098.43,4017.72 4090.55,4017.72 4094.49,4021.65
  region: 4149.61,3753.94 4090.55,3812.99 4200.79,3812.99 4208.66,3812.99 4204.72,3809.05
  text "MODE" at 4051.18,4248.03 h59.06
  text "C" at 2212.6,3153.54 h59.06
  text "D" at 2462.32,3153.54 h59.06
  text "E" at 2712.04,3153.54 h59.06
  text "F" at 2961.75,3153.54 h59.06
  text "G" at 3211.47,3153.54 h59.06
  text "A" at 3461.19,3153.54 h59.06
  text "B" at 3710.91,3153.54 h59.06
  text "C" at 3960.63,3153.54 h59.06

## Text inside footprints (layer, text, board x,y; h text height)
P1: Top Overlay "1" at 2090.87,4283.75 h40; Top Overlay "51" at 2079.06,3321.15 h40